# Altium PCB Low_Pass_Filter_Ing_Galilee.PcbDoc
Units mm, origin at the board's own origin, x right, y up, seen from the top; angles counter-clockwise.
Board outline 144.78 x 55.88 mm, 2 copper layers (Top Layer, Bottom Layer); 15 components, 10 nets, 51 pads, 0 vias.
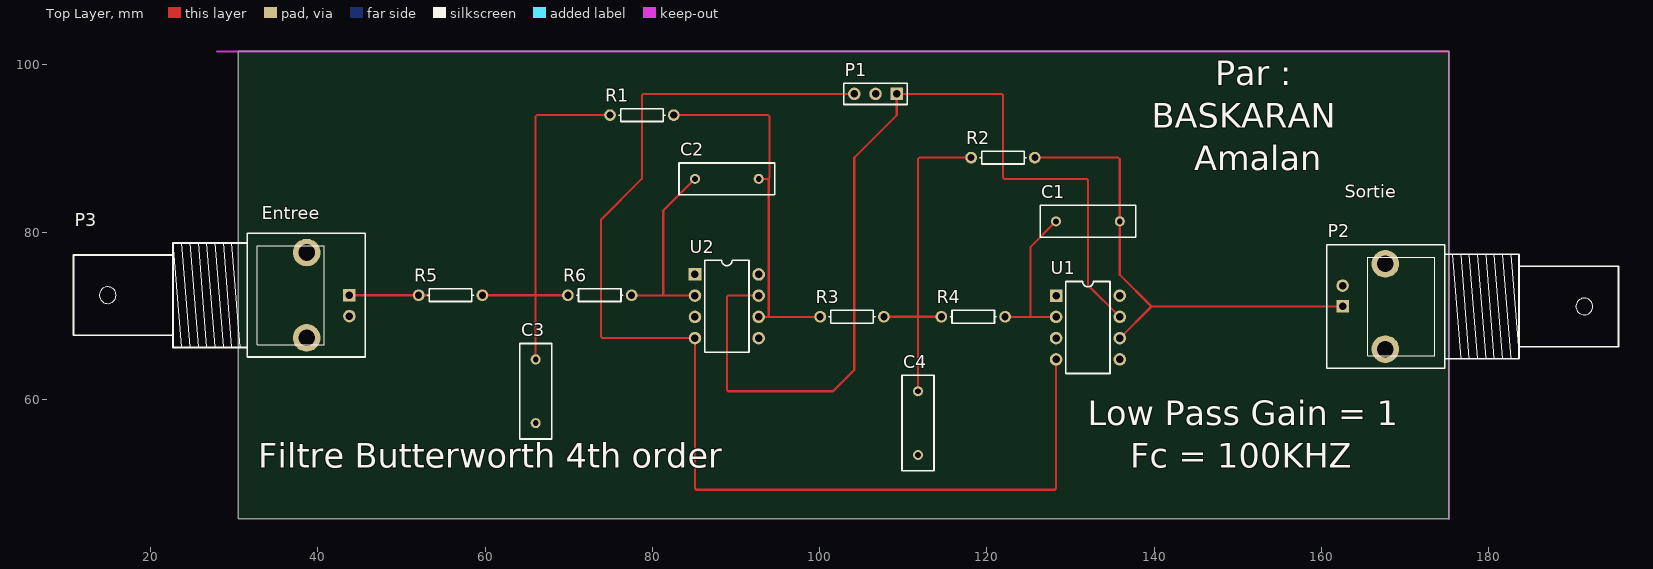
[diagram p0: Top Layer view]
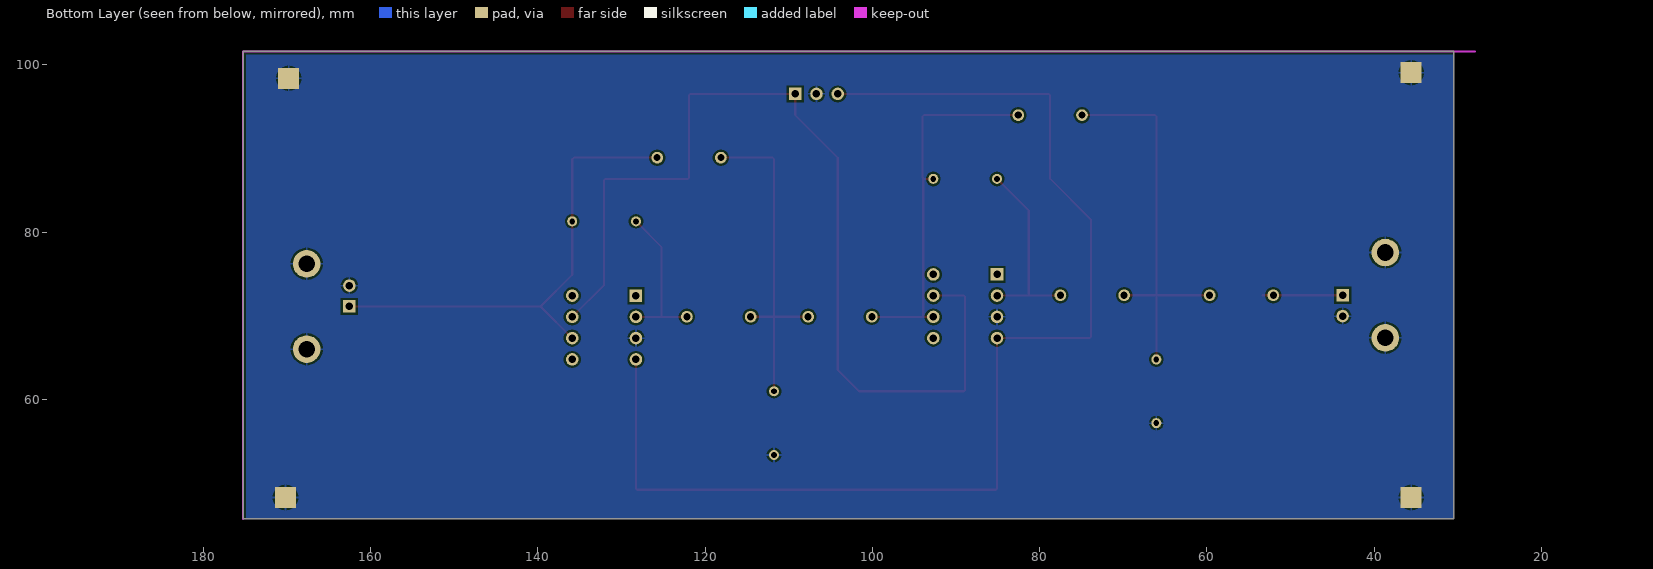
[diagram p1: Bottom Layer view, seen from below]

## Layer stack, top to bottom
Top Solder: solder mask 0.0102, Solder Resist, Dk 3.5
Top Layer: signal copper 0.0356
Dielectric 1: dielectric 0.32, FR-4, Dk 4.8
Bottom Layer: signal copper 0.0356
Bottom Solder: solder mask 0.0102, Solder Resist, Dk 3.5

## Board outline
175.26,45.72 175.26,101.6 30.48,101.6 30.48,45.72

## Design rules (kind name [scope] priority, off if disabled: settings)
Clearance [All] p1: gap=0.254 ignorepadtopadclearanceinfootprint=FALSE except(0: Arc-Hole Track-Hole SMDPad-Hole THPad-Hole Via-Hole Fill-Hole Poly-Hole Region-Hole Text-Hole)
PolygonConnect [All] p1: connectstyle=Relief reliefconductorwidth=0.254 reliefentries=4 polygonreliefangle="90 Angle" airgapwidth=0.254
RoutingVias [All] p1: holewidth=0.711 width=1.27 viastyle="Through Hole" minholewidth=0.711 minwidth=1.27 maxholewidth=0.711 maxwidth=1.27
SolderMaskExpansion [All] p1: expansion=0.102 istentingtop=FALSE
Width [All] p1: maxlimit=0.254 minlimit=0.254 preferedwidth=0.254 minimp=50.000000 maximp=50.000000 favimp=50.000000
30 further rules are at their usual default settings.

## Components (designator, comment, footprint, x,y, rotation, side; value= is the part's Value field where it differs from the comment)
C1 "Cap" RAD-0.3 132.08,81.28 r180 top value=100pF
C2 "Cap" RAD-0.3 88.9,86.36 r180 top value=100pF
C3 "Cap" RAD-0.3 66.04,60.96 r90 top value=100pF
C4 "Cap" RAD-0.3 111.76,57.15 r90 top value=100pF
P1 "Header 3" HDR1X3 109.22,96.52 r180 top
P2 "BNC" "BNC_RA CON" 162.54,71.1 r180 top
P3 "BNC" "BNC_RA CON" 43.76,72.448 r0 top
R1 "Res1" AXIAL-0.3 78.74,93.98 r0 top value=1K
R2 "Res1" AXIAL-0.3 121.92,88.9 r0 top value=1K
R3 "Res1" AXIAL-0.3 103.871,69.867 r0 top value=1K
R4 "Res1" AXIAL-0.3 118.366,69.867 r0 top value=1K
R5 "Res1" AXIAL-0.3 55.858,72.448 r0 top value=1K
R6 "Res1" AXIAL-0.3 73.7,72.448 r0 top value=1K
U1 "OP27EP" N-8_A 132.08,68.58 r270 top
U2 "OP27EP" N-8_A 88.9,71.12 r270 top

## Footprints (in the part's own frame and the unit in brackets; to place one, negate y for a bottom-side part, rotate by r counter-clockwise, add the part's x,y. Pads: shape width x height; smd on the part's side, far side on the other; paste and mask are expansions set on the pad)
AXIAL-0.3 [mm] "Axial Device, Thru-Hole; 2 Leads; 0.3 in Pin Spacing"
  round 1.4 hole 0.85: 1(-3.81,0) 2(3.81,0)
  silkscreen extent -2.77,-0.76 2.77,0.76
"BNC_RA CON" [mm] "Connector; BNC Elbow"
  rect 1.5x1.5 hole 0.9: 1(0,0)
  round 3.3 hole 2: 2(-5.1,5.1) 2(-5.1,-5.1)
  round 1.5 hole 0.9: 2(0,-2.5)
  silkscreen extent -33,-7.4 1.9,7.4
HDR1X3 [mm] "Connector; Header; 3 Position"
  rect 1.5x1.5 hole 0.9: 1(0,0)
  round 1.5 hole 0.9: 2(2.54,0) 3(5.08,0)
  silkscreen extent -1.27,-1.27 6.35,1.27
N-8_A [mm] "DIP; 8 Leads; Row Spacing 7.62 mm; Pitch 2.54 mm"
  rect 1.5x1.5 hole 0.9: 1(-3.81,-3.81)
  round 1.5 hole 0.9: 2(-1.27,-3.81) 3(1.27,-3.81) 4(3.81,-3.81) 5(3.81,3.81) 6(1.27,3.81) 7(-1.27,3.81) 8(-3.81,3.81)
  silkscreen extent -5.5,-2.65 5.5,2.65
RAD-0.3 [mm] "Radial Cap, Thru-Hole; 2 Leads; 0.3 in Pin Spacing"
  round 1.2 hole 0.7: 1(-3.81,0) 2(3.81,0)
  silkscreen extent -5.71,-1.91 5.71,1.91

## Part data
C1 C2 C3 C4: "Capacitor", LatestRevisionDate=17-Jul-2002, LatestRevisionNote="Re-released for DXP Platform.", PackageDescription="Radial Cap, Thru-Hole; 2 Leads; 0.3 in Pin Spacing", PackageReference=RAD-0.3, Published=8-Jun-2000, Publisher="Altium Limited"
P1: "Header, 3-Pin", LatestRevisionDate=17-Jul-2002, LatestRevisionNote="Re-released for DXP Platform.", Publisher="Altium Limited"
P2 P3: "BNC Elbow Connector", LatestRevisionDate=17-Jul-2002, LatestRevisionNote="Re-released for DXP Platform.", Publisher="Altium Limited"
R1 R2 R3 R4 R5 R6: "Resistor", LatestRevisionDate=17-Jul-2002, LatestRevisionNote="Re-released for DXP Platform.", PackageDescription="Axial Device, Thru-Hole; 2 Leads; 0.3 in Pin Spacing", PackageReference=AXIAL-0.3, Published=8-Jun-2000, Publisher="Altium Limited"
U1 U2: "Low-Noise, Precision Operational Amplifier", Code_JEDEC=MO-001-AN, ComponentLink1Description="Manufacturer Link", ComponentLink1URL=http://www.analog.com/en/prod/0,,759_786_OP27%2C00.html, ComponentLink2Description=Datasheet, ComponentLink2URL=http://www.analog.com/UploadedFiles/Data_Sheets/314538596OP27_c.pdf, DatasheetVersion=1992, LatestRevisionDate=04-Mar-2005, LatestRevisionNote="Stylized 3D Model Added.", Note="Pin 5 is not connected.", PackageDescription="DIP; 8 Leads; Row Spacing 7.62 mm; Pitch 2.54 mm", PackageReference=N-8_A, Published=8-Jun-2000, Publisher="Altium Limited"

## Free pads (board coordinates)
  rect 2.5x2.5 smd far side: 2(35.56,48.26) 2(35.56,99.06) 2(169.797,98.382)
  rect 2.5x2.5 smd far side mask+0.102: 2(170.18,48.26)

## Nets (pads, with @x,y where several pads share a name; then routed paths per layer and width w, separated by ;. In a path a pad name is that pad's centre, name@x,y a point inside that pad or via, vN(x,y) a via of type N, cw(c..) or ccw(c..) an arc to the next point about the centre after c; other vN are vias at no path point)
+12: P1.1 U1.7 U2.7 | length 117.4
  Top Layer w0.254: U2.7 92.692,72.408 89.049,72.408 88.9,72.26 88.9,61.109 89.049,60.96 101.6,60.96 104.14,63.5 104.14,88.9 109.22,93.98 P1.1 121.771,96.52 121.92,96.371 121.92,86.509 122.069,86.36 131.931,86.36 132.08,86.211 132.08,73.66 U1.7
-12: P1.3 U1.4 U2.4 | length 144.4
  Top Layer w0.254: P1.3 78.889,96.52 78.74,96.371 78.74,86.36 73.856,81.476 73.856,67.499 74.004,67.35 85.05,67.35 U2.4 85.09,49.33 85.239,49.181 128.121,49.181 128.27,49.33 U1.4
GND: C3.1 C4.1 P1.2 P2.2 P3.2 pad.2 U1.3 U2.3 | length 0
  Top Layer w0.254: C3.1 C3.1@66.059,57.169 ; U1.3@128.259,67.321 U1.3
NetC1_1: C1.1 P2.1 R2.2 U1.6 | length 57.6
  Top Layer w0.254: R2.2 135.694,88.9 135.89,88.704 C1.1 135.89,74.89 139.68,71.1 ; U1.6 139.68,71.1 ; P2.1 139.68,71.1
NetC1_2: C1.2 R4.2 U1.2 | length 18.8
  Top Layer w0.254: R4.2 122.184,69.858 125.223,69.858 ; U1.2 128.262,69.858 125.223,69.858 ; C1.2 125.223,78.233 125.223,69.858
NetC2_1: C2.1 R1.2 R3.1 U2.6 | length 44.1
  Top Layer w0.254: R1.2 93.831,93.98 93.98,93.831 93.98,86.509 93.906,86.434 ; U2.6 92.718,69.858 100.053,69.858 R3.1 ; C2.1 93.831,86.36 93.906,86.434 ; 93.904,69.86 93.906,69.861 93.906,86.434
NetC2_2: C2.2 R6.2 U2.2 | length 23.1
  Top Layer w0.254: R6.2 77.539,72.419 81.3,72.419 ; U2.2 85.061,72.419 81.3,72.419 ; C2.2 81.3,82.57 81.3,72.419
NetC3_2: C3.2 R1.1 R5.2 R6.1 | length 48.2
  Top Layer w0.254: R5.2 66.04,72.448 ; C3.2 66.04,72.448 ; R6.1 66.04,72.448 ; R1.1 66.189,93.98 66.04,93.831 66.04,72.448
NetC4_2: C4.2 R2.1 R3.2 R4.1 | length 41.1
  Top Layer w0.254: R3.2 111.782,69.867 ; C4.2 111.76,69.845 111.782,69.867 ; R4.1 111.782,69.867 ; R2.1 111.931,88.9 111.782,88.751 111.782,69.867
NetP3_1: P3.1 R5.1 | length 9.6
  Top Layer w0.254: P3.1 R5.1 53.318,72.448
pads on no net: U1.1 U1.5 U1.8 U2.1 U2.5 U2.8

## Polygon pours and split planes (outlines as drawn)
GND on Bottom Layer "GND_L02_P003" (solid, pour order 3): 30.48,101.6 175.26,101.6 175.26,45.72 30.48,45.72

## Keep-outs
Keep-Out Layer:
  lines w0.254: 27.94,101.6 175.26,101.6 175.26,45.72

## Silkscreen, mask and mechanical layers (free items; w line width, h text height)
Top Overlay:
  text "Par :" at 147.32,96.571 h5
  text "BASKARAN" at 139.7,91.496 h5
  text "Amalan" at 144.78,86.411 h5
  text "Sortie" at 162.814,84.074 h1.52
  text "Entree" at 33.274,81.534 h1.52
  text "Low Pass Gain = 1" at 132.08,55.936 h5
  text "Filtre Butterworth 4th order" at 32.839,50.846 h5
  text "Fc = 100KHZ" at 137.16,50.856 h5